# Altium PCB LineDetector.PcbDoc
Units mm, origin at the board's own origin, x right, y up, seen from the top; angles counter-clockwise.
Board outline 15 x 50 mm, 2 copper layers (Top Layer, Bottom Layer); 34 components, 18 nets, 82 pads, 13 vias.
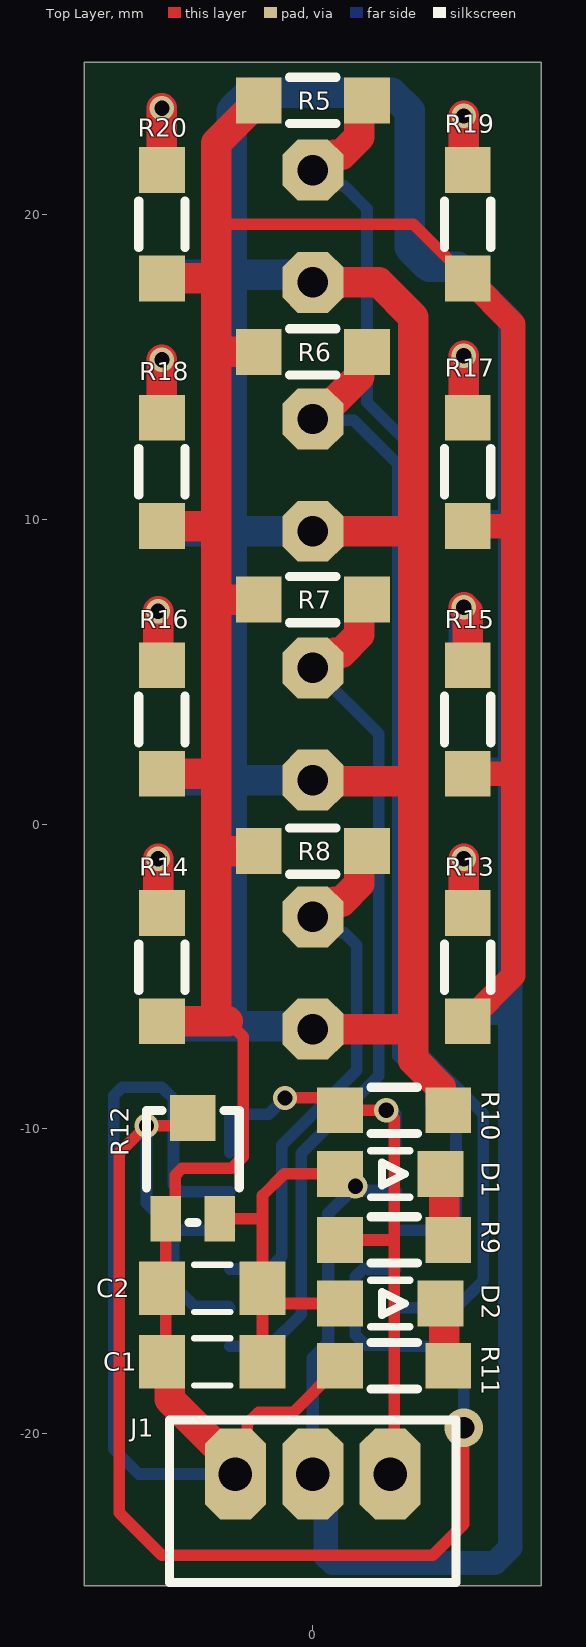
[diagram p0: Top Layer view]
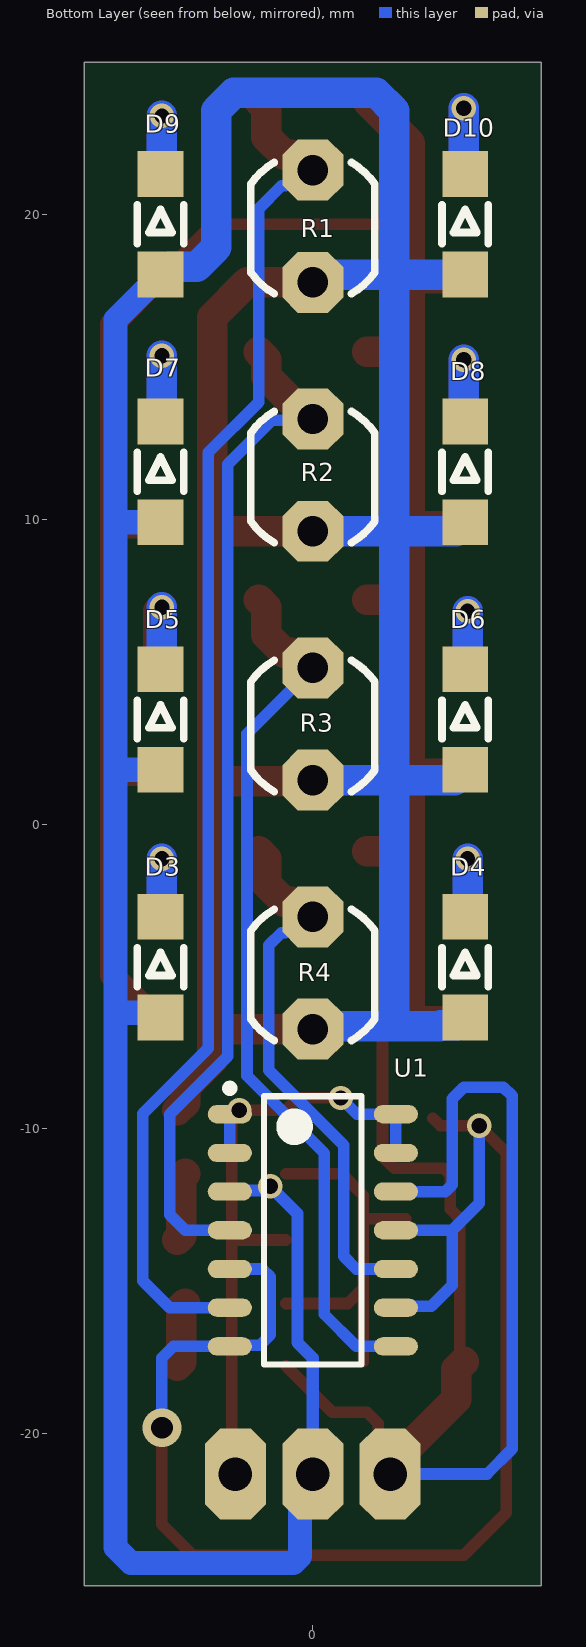
[diagram p1: Bottom Layer view, seen from below]
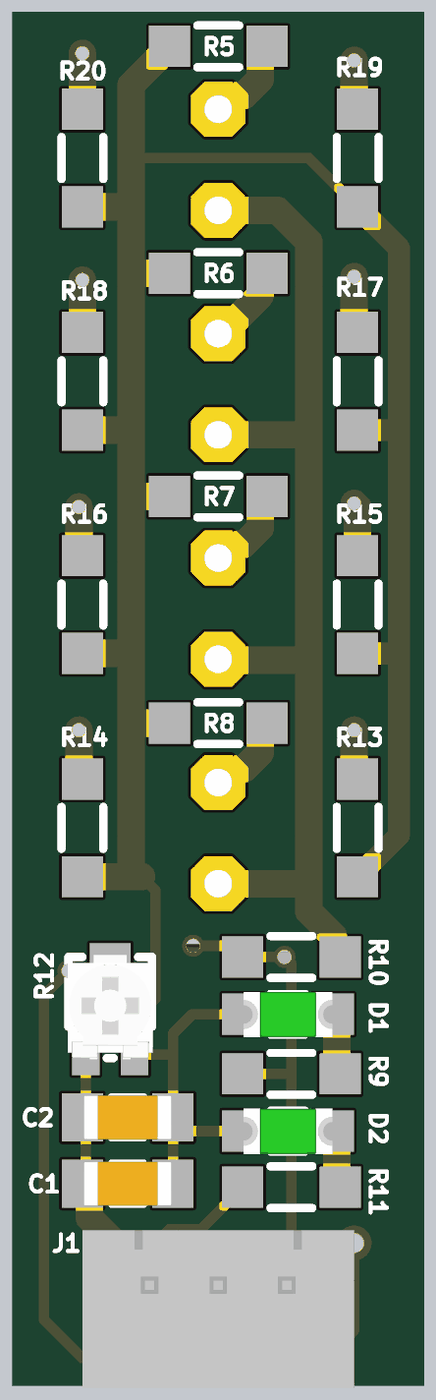
[diagram p2: 3D render of the assembled board from above, using the file's embedded part models]
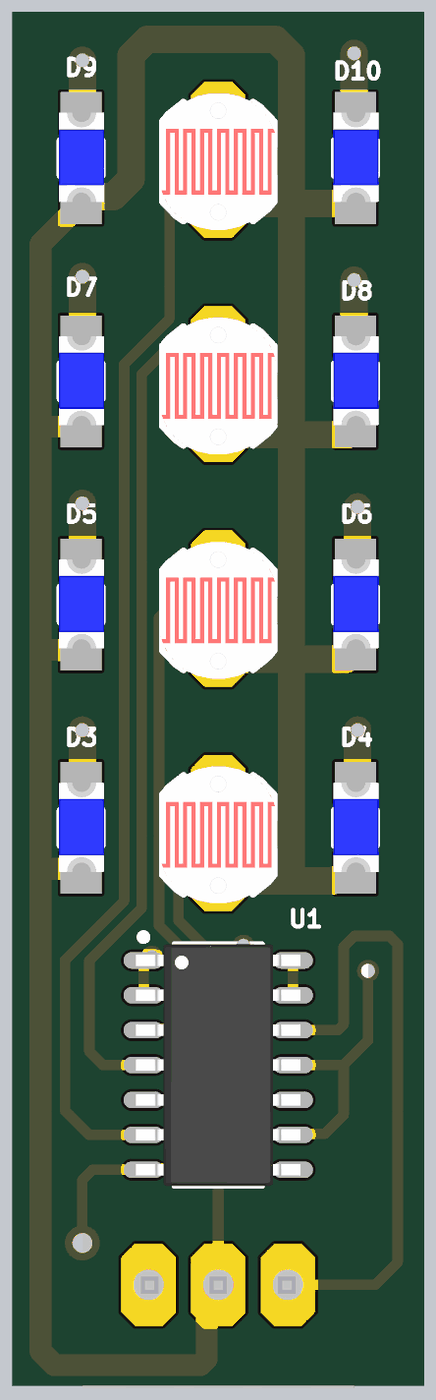
[diagram p3: 3D render of the assembled board from below, using the file's embedded part models]

## Layer stack, top to bottom
Top Solder: solder mask 0.0102, Solder Resist, Dk 3.5
Top Layer: signal copper 0.0356
Dielectric 1: dielectric 0.32, FR-4, Dk 4.8
Bottom Layer: signal copper 0.0356
Bottom Solder: solder mask 0.0102, Solder Resist, Dk 3.5

## Board outline
-7.5,-25 -7.5,25 7.5,25 7.5,-25

## Design rules (kind name [scope] priority, off if disabled: settings)
Clearance [All] p1: gap=0.254 ignorepadtopadclearanceinfootprint=FALSE except(0: Arc-Hole Track-Hole SMDPad-Hole THPad-Hole Via-Hole Fill-Hole Poly-Hole Region-Hole Text-Hole)
PolygonConnect [All] p1: connectstyle=Relief reliefconductorwidth=0.254 reliefentries=4 polygonreliefangle="90 Angle" airgapwidth=0.254
RoutingVias [All] p1: holewidth=0.6 width=1 viastyle="Through Hole" minholewidth=0.5 minwidth=0.8 maxholewidth=0.711 maxwidth=1.27
SolderMaskExpansion [All] p1: expansion=0.102 istentingtop=FALSE
Width [All] p1: maxlimit=10 minlimit=0.254 preferedwidth=0.254
30 further rules are at their usual default settings.

## Components (designator, comment, footprint, x,y, rotation, side; value= is the part's Value field where it differs from the comment)
C1 "CAP" CAP1206 -3.302,-17.653 r0 top
C2 "CAP" CAP1206 -3.302,-15.24 r0 top
D1 "LED" "LED GREEN 1206" 2.54,-11.485 r0 top
D2 "LED" "LED GREEN 1206" 2.54,-15.739 r0 top
D3 "LED" "LED BLUE 1206" 5,-4.699 r90 bottom locked
D4 "LED" "LED BLUE 1206" -5,-4.699 r90 bottom locked
D5 "LED" "LED BLUE 1206" 5,3.429 r90 bottom locked
D6 "LED" "LED BLUE 1206" -5,3.429 r90 bottom locked
D7 "LED" "LED BLUE 1206" 5,11.557 r90 bottom locked
D8 "LED" "LED BLUE 1206" -5,11.557 r90 bottom locked
D9 "LED" "LED BLUE 1206" 5,19.685 r90 bottom locked
D10 "LED" "LED BLUE 1206" -5,19.685 r90 bottom locked
J1 "XH3" "XH 3PIN" 0,-22.225 r180 top locked
R1 "LDR" LDR 0,19.558 r90 bottom locked
R2 "LDR" LDR 0,11.388 r90 bottom locked
R3 "LDR" LDR 0,3.217 r90 bottom locked
R4 "LDR" LDR 0,-4.953 r90 bottom locked
R5 "RES" RES1206 0,23.749 r0 top
R6 "RES" RES1206 0,15.494 r0 top
R7 "RES" RES1206 0,7.366 r0 top
R8 "RES" RES1206 0,-0.889 r0 top
R9 "RES" RES1206 2.667,-13.652 r180 top
R10 "RES" RES1206 2.667,-9.398 r180 top
R11 "RES" RES1206 2.667,-17.78 r180 top
R12 "Pot" potentiometer -3.937,-11.176 r0 top
R13 "RES" RES1206 5.08,-4.699 r270 top
R14 "RES" RES1206 -4.953,-4.699 r270 top
R15 "RES" RES1206 5.08,3.429 r270 top
R16 "RES" RES1206 -4.953,3.429 r270 top
R17 "RES" RES1206 5.08,11.557 r270 top
R18 "RES" RES1206 -4.953,11.557 r270 top
R19 "RES" RES1206 5.08,19.685 r270 top
R20 "RES" RES1206 -4.953,19.685 r270 top
U1 "LM339" LM339 0,-13.335 r180 bottom locked

## Footprints (in the part's own frame and the unit in brackets; to place one, negate y for a bottom-side part, rotate by r counter-clockwise, add the part's x,y. Pads: shape width x height; smd on the part's side, far side on the other; paste and mask are expansions set on the pad)
CAP1206 [mm] "Chip Capacitor, 2-Leads, Body 3.20x1.60mm, IPC Medium Density"
  rect 1.5x1.75 smd: 1(-1.651,0) 2(1.651,0)
  silkscreen extent -0.6,-0.77 0.6,0.77, body extent -1.6,-0.8 1.6,0.8, height 1
LDR [mm]
  oct 2x2 hole 1: 1(-1.778,0) 2(1.905,0)
  silkscreen extent -2.15,-2.03 2.15,2.03, body extent -2.5,-2.15 2.5,2.15, height 2.9
"LED BLUE 1206" [mm]
  rect 1.5x1.5 smd: 1(-1.651,0) 2(1.651,0)
  silkscreen extent -0.64,-0.76 0.64,0.76, body extent -1.61,-0.85 1.66,0.8, height 0.9
"LED GREEN 1206" [mm]
  rect 1.5x1.5 smd: 1(-1.651,0) 2(1.651,0)
  silkscreen extent -0.64,-0.76 0.64,0.76, body extent -1.63,-0.83 1.64,0.82, height 0.9
LM339 [mm] "SOIC, 14-Leads, Body 8.65x3.90mm, Pitch 1.27mm, IPC Medium Density"
  oval 1.45x0.6 smd: 1(-2.725,3.81) 2(-2.725,2.54) 3(-2.725,1.27) 4(-2.725,0) 5(-2.725,-1.27) 6(-2.725,-2.54) 7(-2.725,-3.81) 8(2.725,-3.81) 9(2.725,-2.54) 10(2.725,-1.27) 11(2.725,0) 12(2.725,1.27) 13(2.725,2.54) 14(2.725,3.81)
  silkscreen extent -2.85,-4.4 1.6,4.78, body extent -3,-4.4 3,4.4, height 1.75
potentiometer [mm]
  rect 1x1.5 smd: 1(-0.889,-1.778) 3(0.889,-1.778)
  rect 1.5x1.5 smd: 2(0,1.524)
  silkscreen extent -1.52,-1.91 1.52,1.78, body extent -1.55,-1.95 1.55,1.85, height 1.62
RES1206 [mm]
  rect 1.5x1.5 smd: 1(-1.778,0) 2(1.778,0)
  silkscreen extent -0.76,-0.76 0.76,0.76, body extent -1.58,-0.82 1.58,0.82, height 0.53
"XH 3PIN" [mm]
  oct 2x3 hole 1.1: 1(-2.54,-0.889) 2(0,-0.889) 3(2.54,-0.889)
  silkscreen extent -4.7,-2.67 4.7,2.67, body extent -4.95,-2.88 4.95,2.88, height 7

## Part data
C1 C2: library part CAP1206, "Capacitor SMD 1206"
D1 D2 D3 D4 D5 D6 D7 D8 D9 D10: library part "LED SMD 1206", "LED SMD 1206"
J1: library part "XH 3PIN", "XH Connector 3pins"
R1 R2 R3 R4: "Light Depended Resistor"
R5 R6 R7 R8 R9 R10 R11 R13 R14 R15 R16 R17 R18 R19 R20: library part RES1206, "RESISTOR SMD"
R12: library part Potentiometer, "SMD Potentiometer"
U1: "4 Channel Comparetor - OpAmp"

## Via types
v1: diameter 0.8, hole 0.5, Top Layer to Bottom Layer, tented both sides, 12 vias
v2: diameter 1.27, hole 0.711, Top Layer to Bottom Layer, tented both sides, 1 vias

## Nets (pads, with @x,y where several pads share a name; then routed paths per layer and width w, separated by ;. In a path a pad name is that pad's centre, name@x,y a point inside that pad or via, vN(x,y) a via of type N, cw(c..) or ccw(c..) an arc to the next point about the centre after c; other vN are vias at no path point)
GND: C1.1 C2.1 J1.3 R5.1 R6.1 R7.1 R8.1 R11.2 R12.1 R13.2 R14.2 R15.2 R16.2 R17.2 R18.2 R19.2 R20.2 U1.12 | length 126.8
  Top Layer w0.381: C1.1 -4.826,-17.526 R12.1 -4.516,-12.644 -4.516,-11.526 -4.293,-11.303 -2.667,-11.303 -2.286,-10.922 -2.286,-6.985 -2.794,-6.477 ; -3.175,19.685 3.302,19.685 R19.2 ; J1.3@-2.404,-21.472 J1.3 -2.152,-20.948 -2.152,-19.678 -1.778,-19.304 -0.635,-19.304 R11.2
  Top Layer w0.8: R13.2 6.584,-4.973 6.584,9.779 ; R15.2 6.477,1.651 ; R17.2 6.584,9.779 ; R19.2 6.584,16.403 6.584,9.779
  Top Layer w1: C1.1 -4.703,-17.903 -4.703,-18.88 -2.54,-21.043 J1.3@-2.54,-21.209 ; R14.2 -3.175,-6.477 ; R16.2 -3.175,1.651 ; R18.2 -3.175,9.779 ; R20.2 -3.175,17.907 ; -2.794,-6.477 -3.175,-6.477 ; R8.1 -3.175,-0.889 ; R7.1 -3.175,7.366 ; R6.1 -3.048,15.494 -3.175,15.367 ; R5.1 -3.175,22.352 -3.175,19.685 -3.175,17.907 ; -3.175,-6.477 -3.175,-0.889 ; -3.175,-0.889 -3.175,1.651 ; -3.175,1.651 -3.175,7.366 ; -3.175,7.366 -3.175,9.779 ; -3.175,9.779 -3.175,15.367 ; -3.175,15.367 -3.175,17.907
  Bottom Layer w0.381: U1.12 -4.349,-12.065 -4.572,-11.842 -4.572,-9.017 -4.953,-8.636 -6.254,-8.636 -6.54,-8.923 -6.54,-20.511 -5.715,-21.336 J1.3
NetD1_2: D1.2 R9.1 | length 2.3
  Top Layer w1: D1.2 4.318,-11.612 4.318,-13.525 R9.1
NetD2_2: D2.2 R11.1 | length 2.1
  Top Layer w1: D2.2 4.318,-15.866 4.318,-17.653 R11.1
NetD3_2: D3.2 R13.1 | length 3.8
  Top Layer w1: v1(4.953,-1.143) 4.953,-2.794 R13.1
  Bottom Layer w1: v1(4.953,-1.143) 4.953,-3.001 D3.2
NetD4_2: D4.2 R14.1 | length 3.8
  Top Layer w1: v1(-5.08,-1.143) -5.08,-2.794 R14.1
  Bottom Layer w1: v1(-5.08,-1.143) -5.08,-2.968 D4.2
NetD5_2: D5.2 R15.1 | length 4
  Top Layer w1: v1(4.953,7.112) 5.08,6.985 R15.1
  Bottom Layer w1: v1(4.953,7.112) 4.953,5.127 D5.2
NetD6_2: D6.2 R16.1 | length 3.8
  Top Layer w1: v1(-5.08,6.985) -5.08,5.334 R16.1
  Bottom Layer w1: v1(-5.08,6.985) -5.08,5.16 D6.2
NetD7_2: D7.2 R17.1 | length 4.3
  Top Layer w1: v1(4.953,15.367) 4.953,13.462 R17.1
  Bottom Layer w1: v1(4.953,15.367) 4.953,13.255 D7.2
NetD8_2: D8.2 R18.1 | length 4
  Top Layer w1: R18.1 v1(-4.953,15.24)
  Bottom Layer w1: D8.2 -4.953,13.255 v1(-4.953,15.24)
NetD9_2: D9.2 R19.1 | length 3.8
  Top Layer w1: v1(4.953,23.241) 4.953,21.59 R19.1
  Bottom Layer w1: v1(4.953,23.241) 4.953,21.383 D9.2
NetD10_2: D10.2 R20.1 | length 4.2
  Top Layer w1: R20.1 v1(-4.953,23.495)
  Bottom Layer w1: D10.2 -4.953,21.383 v1(-4.953,23.495)
OUT: J1.1 R9.2 R10.2 U1.1 U1.2 U1.13 U1.14 | length 22
  Top Layer w0.381: v1(-0.915,-8.991) 0.482,-8.991 R10.2 v1(2.413,-9.398) 2.667,-9.652 2.667,-13.589 ; R9.2 2.603,-13.652 2.667,-13.589 ; J1.1 2.667,-21.209 2.667,-13.589
  Bottom Layer w0.381: U1.13 U1.14 -1.448,-9.525 v1(-0.915,-8.991) ; U1.2 U1.1
S1: R1.2 R5.2 U1.6 | length 45.6
  Top Layer w1: R1.2 0.207,21.463 0.707,21.963 0.942,21.963 1.528,22.549 1.528,23.499 R5.2
  Bottom Layer w0.381: R1.2 0.388,21.463 0.908,20.944 1.027,20.944 1.778,20.193 1.778,13.843 3.429,12.192 3.429,-7.357 5.588,-9.516 5.588,-14.986 4.699,-15.875 U1.6
S2: R2.2 R6.2 U1.4 | length 34
  Top Layer w1: R2.2 0.133,13.293 1.528,14.688 1.528,15.244 R6.2
  Bottom Layer w0.381: R2.2 0.036,13.257 1.348,13.257 2.794,11.811 2.794,-7.62 4.699,-9.525 4.699,-12.827 4.191,-13.335 U1.4
S3: R3.2 R7.2 U1.8 | length 29.2
  Top Layer w1: R3.2 0.207,5.122 0.707,5.622 0.942,5.622 1.528,6.208 1.528,7.116 R7.2
  Bottom Layer w0.381: U1.8 -1.428,-17.145 -0.381,-16.098 -0.381,-10.804 2.159,-8.264 2.159,2.963 R3.2
S4: R4.2 R8.2 U1.10 | length 18.1
  Top Layer w1: R4.2 0.207,-3.048 0.707,-2.548 0.942,-2.548 1.528,-1.962 1.528,-1.139 R8.2
  Bottom Layer w0.381: U1.10 -1.428,-14.605 -1.016,-14.193 -1.016,-10.541 1.445,-8.08 1.445,-3.985 1.027,-3.567 0.908,-3.567 0.388,-3.048 R4.2
VCC: C1.2 C2.2 D1.1 D2.1 D3.1 D4.1 D5.1 D6.1 D7.1 D8.1 D9.1 D10.1 J1.2 R1.1 R2.1 R3.1 R4.1 R10.1 R12.3 U1.3 | length 183.9
  Top Layer w0.381: R12.3 -1.651,-12.954 ; C1.2 C2.2 ; R3.1 R3.1@0.042,1.397 ; D2.1 -1.152,-15.739 C2.2 ; D1.1 -0.944,-11.485 -1.651,-12.192 -1.651,-12.954 ; C2.2 -1.651,-12.954
  Top Layer w1: R4.1 3.302,-6.731 ; R2.1 3.217,9.61 3.302,9.525 ; R1.1 2.159,17.78 3.302,16.637 3.302,9.525 ; R3.1@0.042,1.397 3.302,1.397 ; R10.1 4.195,-9.148 4.195,-8.64 3.302,-7.747 3.302,-6.731 ; 3.302,-6.731 3.302,1.397 ; 3.302,1.397 3.302,9.525
  Bottom Layer w0.381: D6.1 D6.1@-4.661,1.439 ; D8.1 D8.1@-4.704,9.61 ; R1.1@-0.254,18.034 R1.1 ; J1.2 J1.2@0.421,-21.757 ; D3.1 D3.1@5.158,-6.192
  Bottom Layer w0.4: J1.2 0,-17.526 0.508,-17.018 0.508,-12.786 1.397,-11.897 v1(1.397,-11.886) 1.537,-12.027 2.687,-12.027 U1.3
  Bottom Layer w0.8: J1.2@0.421,-21.757 0.421,-24.034 0.644,-24.257 5.969,-24.257 6.477,-23.749 6.477,-5.969 ; D5.1 6.477,1.778 ; D7.1 6.477,9.906 ; D9.1 6.477,16.557 6.477,9.906 ; D3.1@5.158,-6.192 6.254,-6.192 6.477,-5.969 ; 6.477,-5.969 6.477,1.778 ; 6.477,1.778 6.477,9.906
  Bottom Layer w1: D4.1 -4.75,-6.6 -4.199,-6.6 -4.164,-6.635 -2.667,-6.635 ; D10.1 -2.667,18.034 ; D8.1@-4.704,9.61 -2.667,9.61 ; D6.1@-4.661,1.439 -2.667,1.439 ; R1.1@-0.254,18.034 -2.667,18.034 ; R4.1 -0.096,-6.635 -2.667,-6.635 ; R3.1 -2.667,1.439 ; R2.1 -2.667,9.61 ; D9.1 4.75,18.284 3.814,18.284 3.175,18.923 3.175,23.417 2.589,24.003 -2.081,24.003 -2.667,23.417 -2.667,18.034 ; -2.667,-6.635 -2.667,1.439 ; -2.667,1.439 -2.667,9.61 ; -2.667,9.61 -2.667,18.034
Vth: R12.2 U1.5 U1.7 U1.9 U1.11 | length 49.3
  Top Layer w0.381: R12.2 -4.191,-9.906 v1(-5.461,-9.906) -6.35,-10.795 -6.35,-22.606 -4.953,-24.003 3.937,-24.003 4.953,-22.987 v2(4.953,-19.812)
  Bottom Layer w0.381: v1(-5.461,-9.906) -5.461,-12.446 -4.572,-13.335 ; U1.9 -2.767,-15.833 -3.883,-15.833 -4.572,-15.144 -4.572,-13.335 ; U1.11 -4.572,-13.335 ; U1.5 1.651,-14.605 1.397,-14.859 1.397,-16.764 1.736,-17.103 2.683,-17.103 U1.7 4.572,-17.145 4.953,-17.526 v2(4.953,-19.812)

## Silkscreen, mask and mechanical layers (free items; w line width, h text height)
Mechanical 1:
  the board outline again, w0.3